# EAGLE board 2D_PCB (EAGLE 9.7.0)
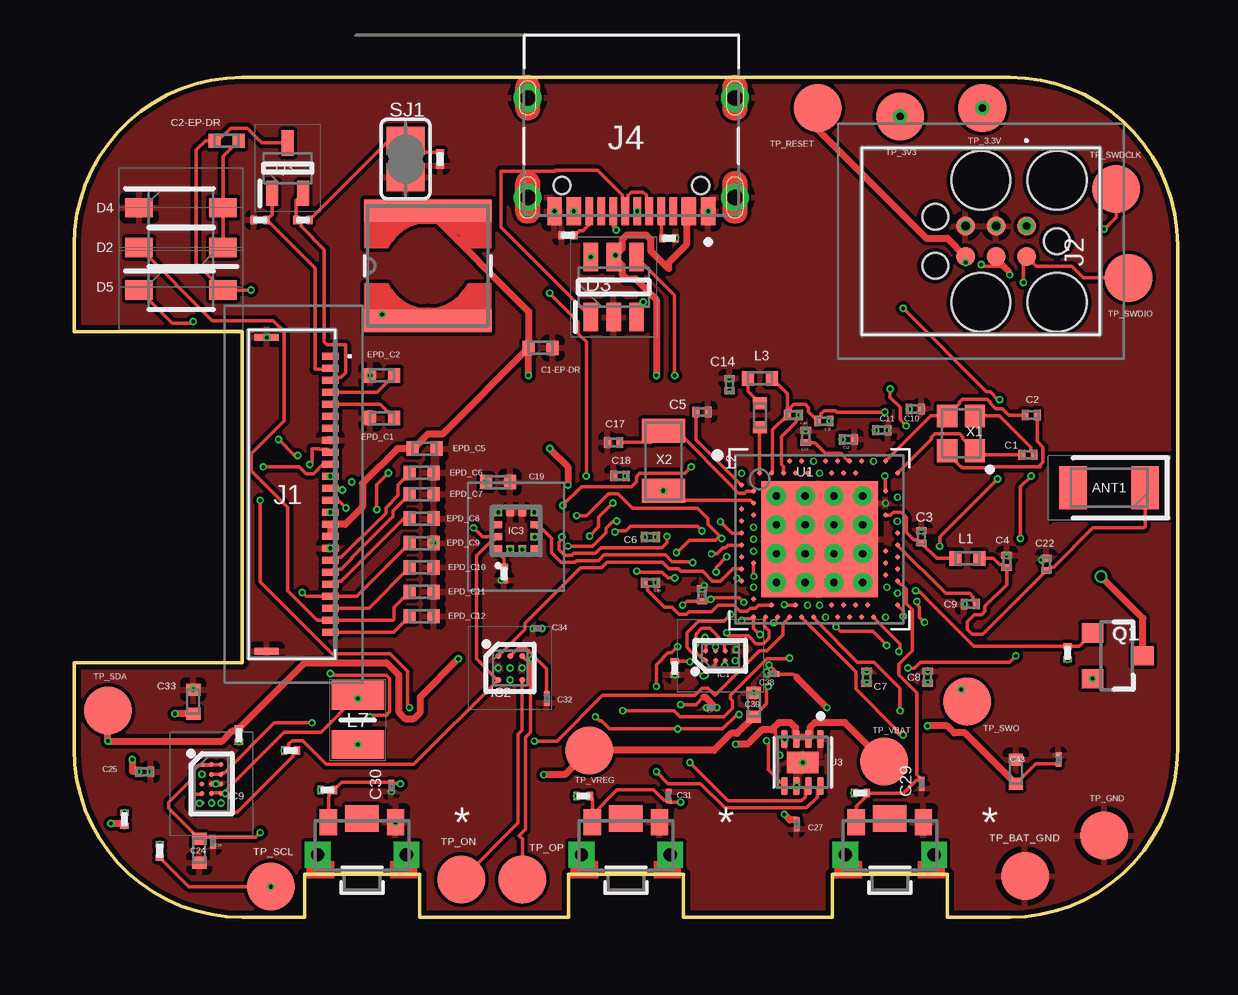
[diagram p0: board, top side]
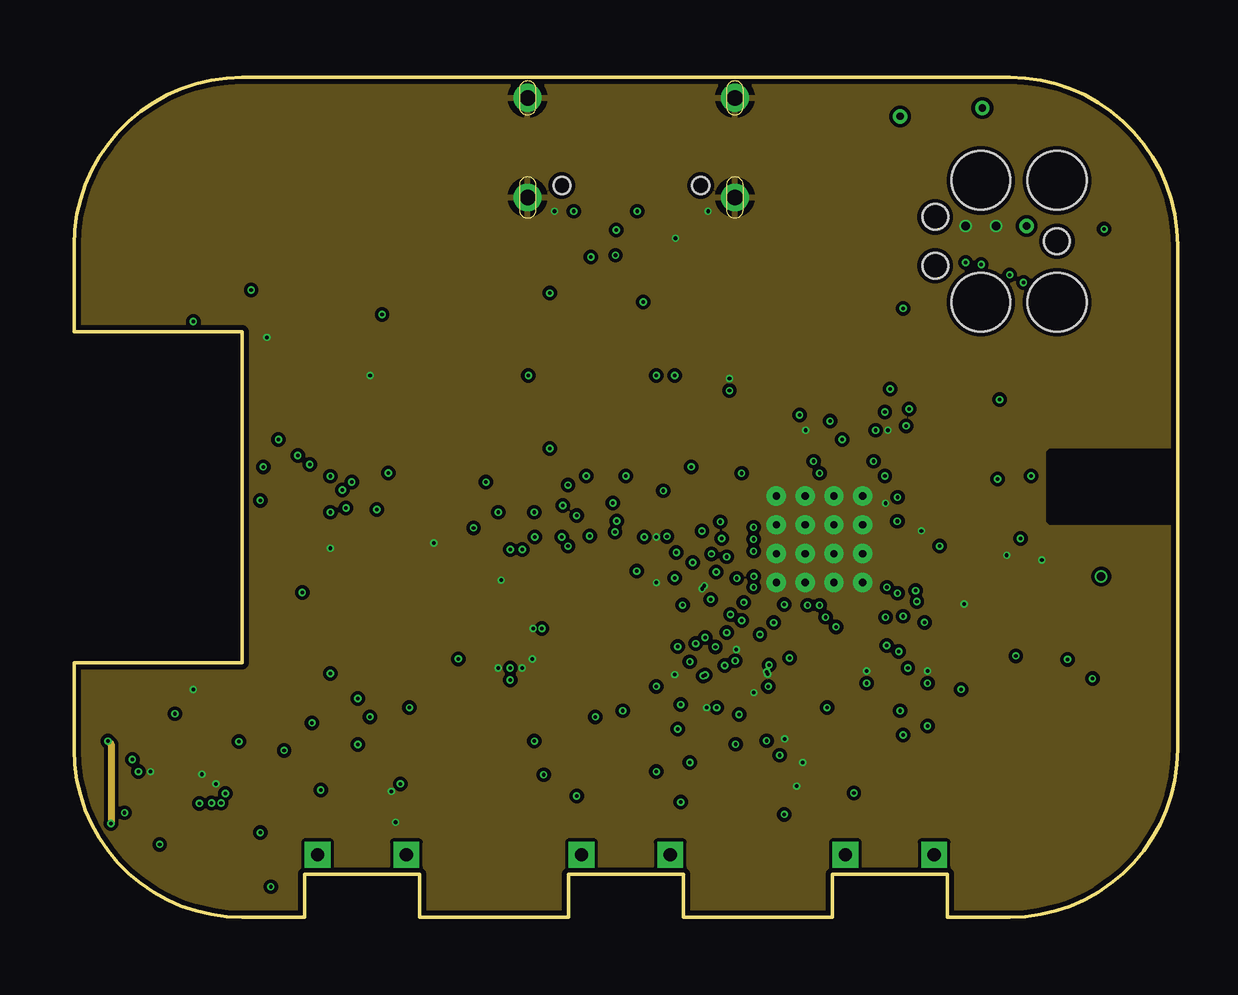
[diagram p1: board, inner layer Route2]
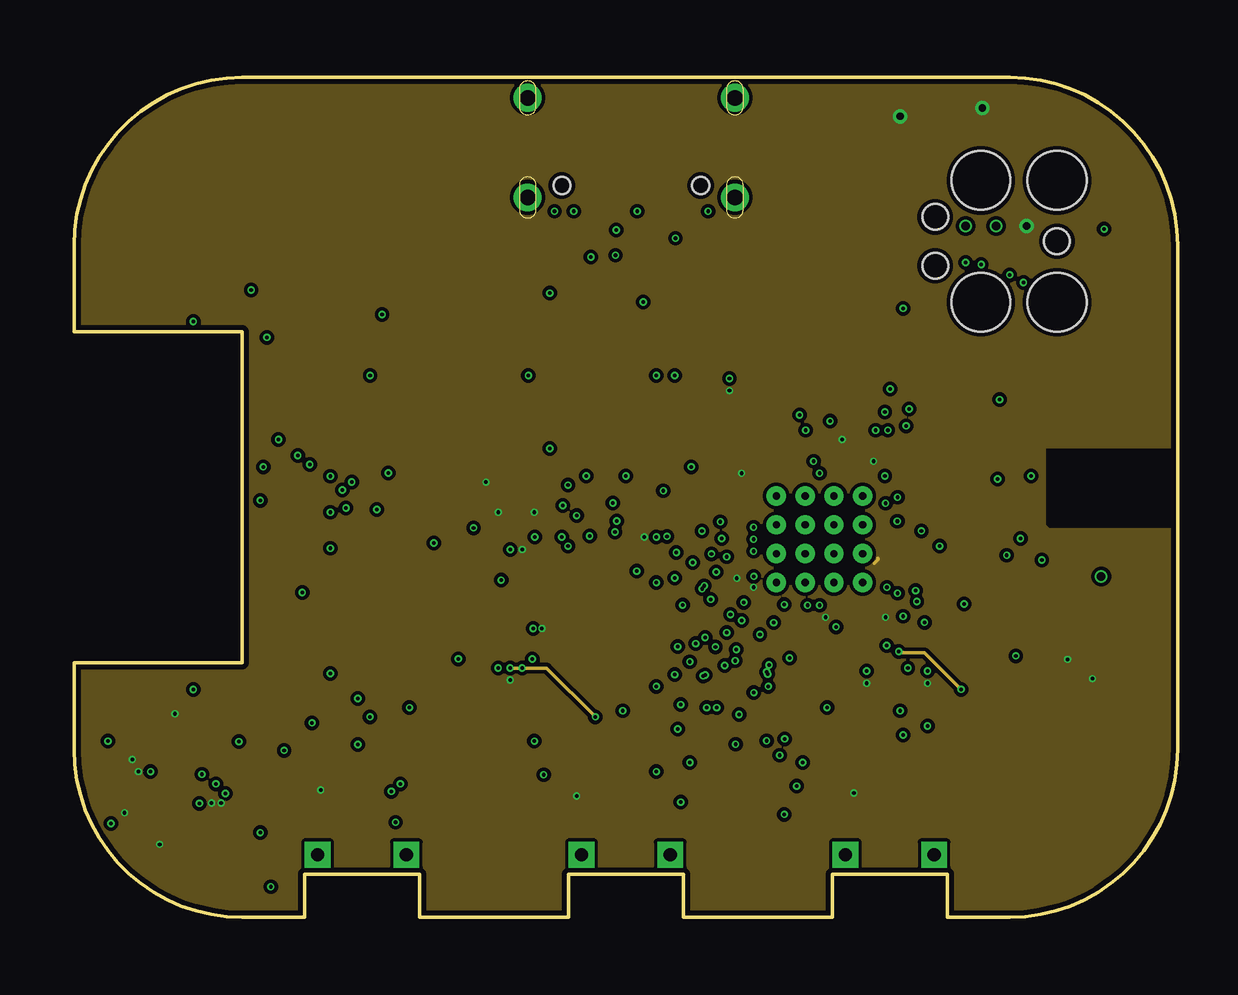
[diagram p2: board, inner layer Route15]
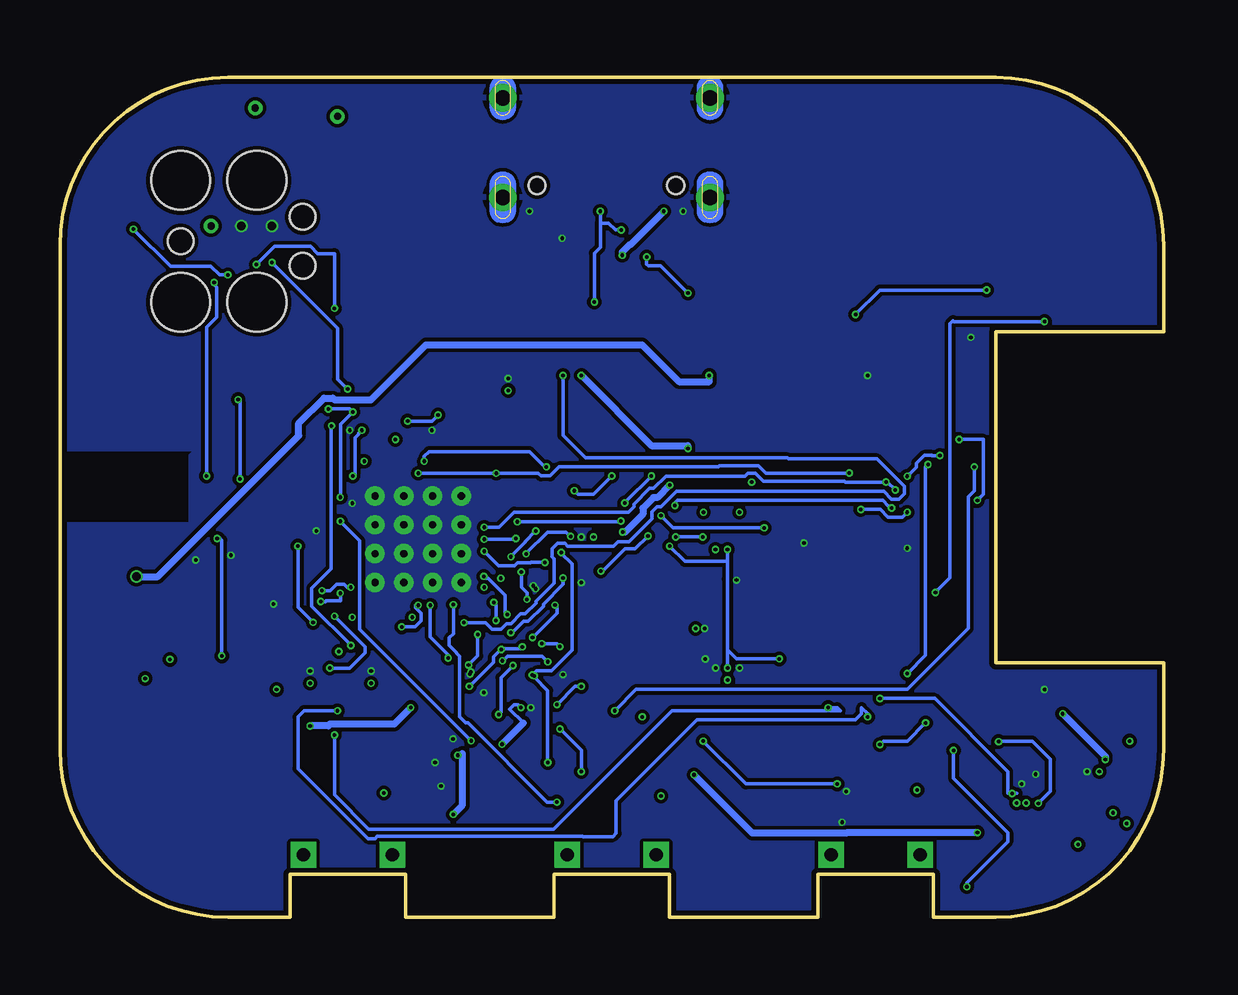
[diagram p3: board, bottom side, seen from below]

Size 46 x 35 mm. Coordinates in mm from the lower left corner, seen from the top.
Outline: 7,35 39,35 arc-90 46,28 46,7 arc-90 39,0 36.4,0 36.4,1.8 31.6,1.8 31.6,0 25.4,0 25.4,1.8 20.6,1.8 20.6,0 14.4,0 14.4,1.8 9.6,1.8 9.6,0 7,0 arc-90 0,7 0,10.6 7,10.6 7,24.4 0,24.4 0,28 arc-90 7,35
Copper layers (1+2*15+16): Top 0.035mm / dielectric 1.5mm / Route2 0.035mm / dielectric 0.15mm / Route15 0.035mm / dielectric 0.2mm / Bottom 0.035mm
Design rules "Fusion Electronics Design Rules *": minimum track width 0.15mm, minimum drill 0.15mm, track to track 0.15mm, track to pad 0.15mm, pad to pad 6mil, via to via 6mil, smd to smd 6mil, copper to edge 0.2mm, drill to drill 6mil, minimum pad ring 10mil, minimum via ring 0.05mm, stop-mask expansion 4mil, vias tented up to drill 9999mil, thermal gap 10mil

## Footprints (pad centres in the part's own frame; a part is rotated, then mirrored left to right if it is on the bottom)
2450AT18B100E_ANTC3216X140N = smd 1.15 x 1.8: 1 -1.5,0; 2 1.5,0
NORDIC_NRF_3_RESC0201_L = smd 0.28 x 0.43: 1 -0.255,0; 2 0.255,0
NORDIC_NRF_3_RESC0402_L = smd 0.5 x 0.6: 1 -0.5,0; 2 0.5,0
GRM011R60J152KE01L_2_CAPC0201X13N = smd 0.22 x 0.23: 1 -0.185,0; 2 0.185,0
ESP32_C6_LIBRARY_5_SOD3716X135N = smd 1.15 x 0.8: 1 -1.75,0; 2 1.75,0
ESP32_C6_LIBRARY_3_SOT95P280X145-6N = smd 1.2 x 0.6: 1 -1.25,0.95; 2 -1.25,0; 3 -1.25,-0.95; 4 1.25,-0.95; 5 1.25,0; 6 1.25,0.95
BQ25180YBGR_BGA8C40P2X4_100X155X50 = smd 0.2 x 0.2: A1 -0.2,0.6; A2 0.2,0.6; B1 -0.2,0.2; B2 0.2,0.2; C1 -0.2,-0.2; C2 0.2,-0.2; D1 -0.2,-0.6; D2 0.2,-0.6
DRV2605YZFR_BGA9C50P3X3_144X144X62 = smd 0.25 x 0.25: A1 -0.5,0.5; A2 0,0.5; A3 0.5,0.5; B1 -0.5,0; B2 0,0; B3 0.5,0; C1 -0.5,-0.5; C2 0,-0.5; C3 0.5,-0.5
BMA423_BMA423 = smd 0.3 x 0.35: 1 -0.75,-0.775; 2 -0.25,-0.775; 3 0.25,-0.775; 4 0.75,-0.775; 7 0.75,0.775; 8 0.25,0.775; 9 -0.25,0.775; 10 -0.75,0.775 | smd 0.35 x 0.3: 5 0.775,-0.25; 6 0.775,0.25; 11 -0.775,0.25; 12 -0.775,-0.25
RT6160AWSC_BGA15C40P3X5_140X230X60 = smd 0.216 x 0.216: A1 -0.4,0.8; A2 0,0.8; A3 0.4,0.8; B1 -0.4,0.4; B2 0,0.4; B3 0.4,0.4; C1 -0.4,0; C2 0,0; C3 0.4,0; D1 -0.4,-0.4; D2 0,-0.4; D3 0.4,-0.4; E1 -0.4,-0.8; E2 0,-0.8; E3 0.4,-0.8
503480-2400_5034802400 = smd 0.3 x 0.7: 1 -5.75,1.525; 2 -5.25,1.525; 3 -4.75,1.525; 4 -4.25,1.525; 5 -3.75,1.525; 6 -3.25,1.525; 7 -2.75,1.525; 8 -2.25,1.525; 9 -1.75,1.525; 10 -1.25,1.525; 11 -0.75,1.525; 12 -0.25,1.525; 13 0.25,1.525; 14 0.75,1.525; 15 1.25,1.525; 16 1.75,1.525; 17 2.25,1.525; 18 2.75,1.525; 19 3.25,1.525; 20 3.75,1.525; 21 4.25,1.525; 22 4.75,1.525; 23 5.25,1.525; 24 5.75,1.525 | smd 0.3 x 1: MP1 -6.54,-1.125; MP2 6.54,-1.125
TC2030-IDC_TC2030IDC = smd 0.783 x 0.783: 1 -0.953,-0.635; 2 -0.953,0.635; 3 0.317,-0.635; 4 0.317,0.635; 5 1.588,-0.635; 6 1.588,0.635 | hole 2.451: -2.223,-2.54; -2.223,2.54; 0.952,-2.54; 0.952,2.54 | hole 1.067: -2.223,0; 2.857,-1.016; 2.857,1.016
KH-TYPE-C-16P_KINGHELM_KH-TYPE-C-16P = smd 0.6 x 1.15: A1_B12 -3.2,4.725; A4_B9 -2.4,4.725; A9_B4 2.4,4.725; A12_B1 3.2,4.725 | smd 0.3 x 1.15: A5 -1.25,4.725; A6 -0.25,4.725; A7 0.25,4.725; A8 1.25,4.725; B5 1.75,4.725; B6 0.75,4.725; B7 -0.75,4.725; B8 -1.75,4.725 | drill 0.65 pad 1.05: SH1 -4.32,0; SH2 4.32,0; SH3 -4.32,4.15; SH4 4.32,4.15 | hole 0.7: -2.89,3.65; 2.89,3.65
NORDIC_NRF_2_RESC0402_L = smd 0.5 x 0.6: 1 -0.5,0; 2 0.5,0
ESP32_C6_LIBRARY_2_IND_4828-WE-TPC_WRE = smd 0.9 x 5.3: 1 -2.286,0; 2 2.286,0
MLP2016SR47MT0S1_INDC2016X100N = smd 1.2 x 2.2: 1 -1.028,0; 2 1.028,0
ESP32_C6_LIBRARY_4_ESP32_C6_LIBRARY_4_ESP32_C6_LIBRARY_4_ESP32_C6_LIBRARY_4_ESP32_WROVER_SPARKFUN-DISCRETESEMI_SOT23-3 = smd 0.8 x 0.9: 1 -0.95,-1; 2 0.95,-1; 3 0,1.1
ESP32_C6_LIBRARY_6_SOT65P210X110-3N = smd 1.05 x 0.5: 1 -1.05,0.65; 2 -1.05,-0.65; 3 1.05,0
ERA-1AEB3401C_0201 = smd 0.35 x 0.25: 1 0,0.275; 2 0,-0.275
ESP32_C6_LIBRARY_7_JUMPER_SJ = smd 1.168 x 1.6: 1 -0.762,0; 2 0.762,0
2025-10-22_07-23-44_LIBRARY_SW_EVP-AKE31A_PAN = smd 0.711 x 1.092: 1 -1.4,-0.972; 2 1.4,-0.972 | drill 0.559 pad 0.914 square: 3 -1.848,0.381; 4 1.848,0.381 | smd 1.397 x 1.092: 5 0,-1.124
HECTOR_WATCH_1_TP20R = smd 2 x 2: TP 0,0
NORDIC_NRF_4_AQFN50P700X700X85_HS-74N = smd 4.85 x 4.85: P$74 0,0 | drill 0.3 pad 0.6: P$75 -1.8,1.8; P$76 -0.6,1.8; P$77 0.6,1.8; P$78 1.8,1.8; P$79 -1.8,0.6; P$80 -0.6,0.6; P$81 0.6,0.6; P$82 1.8,0.6; P$83 -1.8,-0.6; P$84 -0.6,-0.6; P$85 0.6,-0.6; P$86 1.8,-0.6; P$87 -1.8,-1.8; P$88 -0.6,-1.8; P$89 0.6,-1.8; P$90 1.8,-1.8 | smd 0.2 x 0.2: P$A8 -1.25,3.25; P$A10 -0.75,3.25; P$A12 -0.25,3.25; P$A14 0.25,3.25; P$A16 0.75,3.25; P$A18 1.25,3.25; P$A20 1.75,3.25; P$A22 2.25,3.25; P$A23 2.75,3.25; P$AA24 3.25,-2.25; P$AB2 -2.75,-2.5; P$AC5 -2,-2.75; P$AC9 -1,-2.75; P$AC11 -0.5,-2.75; P$AC13 0,-2.75; P$AC15 0.5,-2.75; P$AC17 1,-2.75; P$AC19 1.5,-2.75; P$AC21 2,-2.75; P$AC24 3.25,-2.75; P$AD2 -2.75,-3.25; P$AD4 -2.25,-3.25; P$AD6 -1.75,-3.25; P$AD8 -1.25,-3.25; P$AD10 -0.75,-3.25; P$AD12 -0.25,-3.25; P$AD14 0.25,-3.25; P$AD16 0.75,-3.25; P$AD18 1.25,-3.25; P$AD20 1.75,-3.25; P$AD22 2.25,-3.25; P$AD23 2.75,-3.25; P$B1 -3.25,2.75; P$B3 -2.5,2.75; P$B5 -2,2.75; P$B7 -1.5,2.75; P$B9 -1,2.75; P$B11 -0.5,2.75; P$B13 0,2.75; P$B15 0.5,2.75; P$B17 1,2.75; P$B19 1.5,2.75; P$B24 3.25,2.75; P$C1 -3.25,2.25; P$D2 -2.75,2; P$D23 2.75,2; P$E24 3.25,1.75; P$F2 -2.75,1.5; P$F23 2.75,1.5; P$G1 -3.25,1.25; P$H2 -2.75,1; P$H23 2.75,1; P$J1 -3.25,0.75; P$J24 3.25,0.75; P$K2 -2.75,0.5; P$L1 -3.25,0.25; P$L24 3.25,0.25; P$M2 -2.75,0; P$N1 -3.25,-0.25; P$N24 3.25,-0.25; P$P2 -2.75,-0.5; P$P23 2.75,-0.5; P$R1 -3.25,-0.75; P$R24 3.25,-0.75; P$T2 -2.75,-1; P$T23 2.75,-1; P$U1 -3.25,-1.25; P$U24 3.25,-1.25; P$V23 2.75,-1.5; P$W1 -3.25,-1.75; P$W24 3.25,-1.75; P$Y2 -2.75,-2; P$Y23 2.75,-2
ESP32_C6_LIBRARY_SON50P200X200X80-9N = smd 0.76 x 0.27: 1 -0.985,0.75; 2 -0.985,0.25; 3 -0.985,-0.25; 4 -0.985,-0.75; 5 0.985,-0.75; 6 0.985,-0.25; 7 0.985,0.25; 8 0.985,0.75 | smd 0.9 x 1.3: 9 0,0
NORDIC_NRF_BT-XTAL_2016_N = smd 0.95 x 0.85: 1 -0.725,-0.575; 2 0.725,-0.575; 3 0.725,0.575; 4 -0.725,0.575
NORDIC_NRF_1_XTAL_3215_N = smd 1 x 1.8: 1 -1.25,0; 2 1.25,0

## Placement (x,y rotation side)
ANT1  2450AT18B100E  [2450AT18B100E_ANTC3216X140N]  43.14,17.9 180 top
C1  12pF  [NORDIC_NRF_3_RESC0201_L]  39.76,19.28 0 top
C1-EP-DR  10uF  [NORDIC_NRF_3_RESC0402_L]  19.44,23.72 0 top
C2  12pF  [NORDIC_NRF_3_RESC0201_L]  39.89,20.93 0 top
C2-EP-DR  4.7uF/25V  [NORDIC_NRF_3_RESC0402_L]  6.36,32.36 180 top
C3  1pF  [NORDIC_NRF_3_RESC0201_L]  35.32,15.85 90 top
C4  1pF  [NORDIC_NRF_3_RESC0201_L]  38.88,14.83 90 top
C5  100nF  [NORDIC_NRF_3_RESC0201_L]  26.18,21.06 0 top
C6  4.7µF  [NORDIC_NRF_3_RESC0201_L]  24.02,15.85 0 top
C7  100nF  [NORDIC_NRF_3_RESC0201_L]  33.03,10.01 90 top
C8  100nF  [NORDIC_NRF_3_RESC0201_L]  35.57,10.01 90 top
C9  820pF  [NORDIC_NRF_3_RESC0201_L]  37.35,13.05 180 top
C10  N.C.  [NORDIC_NRF_3_RESC0201_L]  35.06,21.18 0 top
C11  100pF  [NORDIC_NRF_3_RESC0201_L]  33.67,20.29 0 top
C12  100nF  [NORDIC_NRF_3_RESC0201_L]  32.27,19.91 0 top
C13  N.C.  [NORDIC_NRF_3_RESC0201_L]  30.49,20.04 90 top
C14  4.7µF  [NORDIC_NRF_3_RESC0201_L]  27.32,22.2 90 top
C15  1.0µF  [NORDIC_NRF_3_RESC0201_L]  31.26,20.68 0 top
C16  47nF  [NORDIC_NRF_3_RESC0201_L]  29.98,20.93 0 top
C17  12pF  [NORDIC_NRF_3_RESC0201_L]  22.49,19.79 0 top
C18  12pF  [NORDIC_NRF_3_RESC0201_L]  22.75,18.39 0 top
C19  100nF  [NORDIC_NRF_3_RESC0402_L]  17.67,18.14 0 top
C20  4.7µF  [NORDIC_NRF_3_RESC0201_L]  24.02,13.94 0 top
C21  4.7µF  [NORDIC_NRF_3_RESC0201_L]  26.18,13.44 90 top
C22  N.C  [NORDIC_NRF_3_RESC0201_L]  40.53,14.71 90 top
C23  0.1uF  [GRM011R60J152KE01L_2_CAPC0201X13N]  5.79,3.15 90 top
C24  10uF  [NORDIC_NRF_3_RESC0402_L]  5.22,2.77 90 top
C25  22uF  [NORDIC_NRF_3_RESC0201_L]  2.93,6.07 0 top
C27  0.1uF  [GRM011R60J152KE01L_2_CAPC0201X13N]  30.11,3.88 90 top
C29  1uF  [GRM011R60J152KE01L_2_CAPC0201X13N]  35.32,5.56 90 top
C30  1uF  [GRM011R60J152KE01L_2_CAPC0201X13N]  13.22,5.44 90 top
C31  1uF  [GRM011R60J152KE01L_2_CAPC0201X13N]  24.78,5.05 270 top
C32  1uF  [GRM011R60J152KE01L_2_CAPC0201X13N]  19.7,9.12 90 top
C33  22uF  [NORDIC_NRF_3_RESC0402_L]  4.97,8.99 90 top
C34  0.1uF  [GRM011R60J152KE01L_2_CAPC0201X13N]  19.32,12.04 0 top
C37  1uF  [GRM011R60J152KE01L_2_CAPC0201X13N]  26.56,8.74 0 top
C38  1uF  [GRM011R60J152KE01L_2_CAPC0201X13N]  29.1,10.13 0 top
C39  10uF  [NORDIC_NRF_3_RESC0402_L]  28.33,8.86 90 top
C42  0.1uF  [GRM011R60J152KE01L_2_CAPC0201X13N]  41.03,6.58 90 top
C43  4.7uF  [NORDIC_NRF_3_RESC0402_L]  39.26,6.07 90 top
D2  MBR0530  [ESP32_C6_LIBRARY_5_SOD3716X135N]  4.46,27.91 180 top
D3  USBLC6-2SC6Y  [ESP32_C6_LIBRARY_3_SOT95P280X145-6N]  22.49,26.26 90 top
D4  MBR0530  [ESP32_C6_LIBRARY_5_SOD3716X135N]  4.46,29.56 0 top
D5  MBR0530  [ESP32_C6_LIBRARY_5_SOD3716X135N]  4.46,26.14 0 top
EPD_C1  1uF/50V  [NORDIC_NRF_3_RESC0402_L]  12.84,20.8 0 top
EPD_C2  1uF/50V  [NORDIC_NRF_3_RESC0402_L]  12.84,22.58 0 top
EPD_C5  0.1uF/50V  [NORDIC_NRF_3_RESC0402_L]  14.62,19.53 180 top
EPD_C6  1uF/50V  [NORDIC_NRF_3_RESC0402_L]  14.49,18.52 180 top
EPD_C7  1uF/50V  [NORDIC_NRF_3_RESC0402_L]  14.49,17.63 180 top
EPD_C8  1uF/50V  [NORDIC_NRF_3_RESC0402_L]  14.49,16.61 180 top
EPD_C9  1uF/50V  [NORDIC_NRF_3_RESC0402_L]  14.49,15.6 180 top
EPD_C10  1uF/50V  [NORDIC_NRF_3_RESC0402_L]  14.49,14.58 180 top
EPD_C11  1uF/50V  [NORDIC_NRF_3_RESC0402_L]  14.49,13.56 180 top
EPD_C12  1uF/50V  [NORDIC_NRF_3_RESC0402_L]  14.49,12.55 180 top
IC1  BQ25180YBGR  [BQ25180YBGR_BGA8C40P2X4_100X155X50]  26.94,10.9 90 top
IC2  DRV2605YZFR  [DRV2605YZFR_BGA9C50P3X3_144X144X62]  18.17,10.39 0 top
IC3  BMA423  [BMA423_BMA423]  18.43,16.1 0 top
IC9  RT6160AWSC  [RT6160AWSC_BGA15C40P3X5_140X230X60]  5.73,5.56 0 top
J1  503480-2400  [503480-2400_5034802400]  9.16,17.63 270 top
J2  TC2030-IDC  [TC2030-IDC_TC2030IDC]  38.75,28.17 180 top
J4  KH-TYPE-C-16P  [KH-TYPE-C-16P_KINGHELM_KH-TYPE-C-16P]  23.23,34.14 180 top
L1  3.9nH  [NORDIC_NRF_2_RESC0402_L]  37.22,14.96 0 top
L2  10µH  [NORDIC_NRF_2_RESC0402_L]  28.59,20.93 90 top
L3  15nH  [NORDIC_NRF_2_RESC0402_L]  28.59,22.45 0 top
L5  68uH  [ESP32_C6_LIBRARY_2_IND_4828-WE-TPC_WRE]  14.74,27.15 90 top
L7  MLP2016SR47MT0S1  [MLP2016SR47MT0S1_INDC2016X100N]  11.82,8.23 90 top
Q1  20V/4.2A/52mΩ/1.4W  [ESP32_C6_LIBRARY_4_ESP32_C6_LIBRARY_4_ESP32_C6_LIBRARY_4_ESP32_C6_LIBRARY_4_ESP32_WROVER_SPARKFUN-DISCRETESEMI_SOT23-3]  43.45,10.9 270 top
Q3  SI1308EDL-T1-GE3  [ESP32_C6_LIBRARY_6_SOT65P210X110-3N]  8.9,31.22 90 top
R1_EP_DR  0.47  [ERA-1AEB3401C_0201]  9.54,29.06 270 top
R1_USB  5K1  [ERA-1AEB3401C_0201]  24.79,28.3 270 top
R2  0  [ERA-1AEB3401C_0201]  6.87,7.59 0 top
R2_EP_DR  10K  [ERA-1AEB3401C_0201]  7.76,29.06 90 top
R2_USB  5K1  [ERA-1AEB3401C_0201]  20.59,28.42 270 top
R3  0  [ERA-1AEB3401C_0201]  17.92,14.32 0 top
R4  0  [ERA-1AEB3401C_0201]  9.03,6.96 90 top
R5  10k  [ERA-1AEB3401C_0201]  10.55,5.31 270 top
R7  10k  [ERA-1AEB3401C_0201]  32.78,5.18 270 top
R8  10k  [ERA-1AEB3401C_0201]  21.22,5.05 90 top
R9  10k  [ERA-1AEB3401C_0201]  25.03,10.39 180 top
R17  3k3  [ERA-1AEB3401C_0201]  3.57,2.77 0 top
R18  3K3  [ERA-1AEB3401C_0201]  2.1,4.08 0 top
R_PWR_EPD  10k  [ERA-1AEB3401C_0201]  41.41,11.02 0 top
R_TYPE_SEL  2.2  [ERA-1AEB3401C_0201]  15.25,31.6 180 top
SJ1  [ESP32_C6_LIBRARY_7_JUMPER_SJ]  13.82,31.6 90 top
SW_DN  2025-10-22_07-23-44_LIBRARY_EVP-AKE31ASW_EVP-AKE31A_PAN  [2025-10-22_07-23-44_LIBRARY_SW_EVP-AKE31A_PAN]  34,2.99 180 top
SW_ENT  2025-10-22_07-23-44_LIBRARY_EVP-AKE31ASW_EVP-AKE31A_PAN  [2025-10-22_07-23-44_LIBRARY_SW_EVP-AKE31A_PAN]  23,2.99 180 top
SW_UP  2025-10-22_07-23-44_LIBRARY_EVP-AKE31ASW_EVP-AKE31A_PAN  [2025-10-22_07-23-44_LIBRARY_SW_EVP-AKE31A_PAN]  12,2.99 180 top
TP_3.3V  HECTOR_WATCH_1_TPTP20R  [HECTOR_WATCH_1_TP20R]  37.86,33.72 0 top
TP_3V3  HECTOR_WATCH_1_TPTP20R  [HECTOR_WATCH_1_TP20R]  34.43,33.38 0 top
TP_BAT_GND  HECTOR_WATCH_1_TPTP20R  [HECTOR_WATCH_1_TP20R]  39.64,1.72 0 top
TP_GND  HECTOR_WATCH_1_TPTP20R  [HECTOR_WATCH_1_TP20R]  42.94,3.4 0 top
TP_ON  HECTOR_WATCH_1_TPTP20R  [HECTOR_WATCH_1_TP20R]  16.14,1.57 0 top
TP_OP  HECTOR_WATCH_1_TPTP20R  [HECTOR_WATCH_1_TP20R]  18.68,1.57 0 top
TP_RESET  HECTOR_WATCH_1_TPTP20R  [HECTOR_WATCH_1_TP20R]  31,33.72 0 top
TP_SCL  HECTOR_WATCH_1_TPTP20R  [HECTOR_WATCH_1_TP20R]  8.2,1.28 0 top
TP_SDA  HECTOR_WATCH_1_TPTP20R  [HECTOR_WATCH_1_TP20R]  1.41,8.61 0 top
TP_SWDCLK  HECTOR_WATCH_1_TPTP20R  [HECTOR_WATCH_1_TP20R]  43.44,30.34 0 top
TP_SWDIO  HECTOR_WATCH_1_TPTP20R  [HECTOR_WATCH_1_TP20R]  43.95,26.64 0 top
TP_SWO  HECTOR_WATCH_1_TPTP20R  [HECTOR_WATCH_1_TP20R]  37.22,8.99 0 top
TP_VBAT  HECTOR_WATCH_1_TPTP20R  [HECTOR_WATCH_1_TP20R]  33.76,6.49 0 top
TP_VREG  HECTOR_WATCH_1_TPTP20R  [HECTOR_WATCH_1_TP20R]  21.48,6.96 0 top
U1  NRF52840_QF  [NORDIC_NRF_4_AQFN50P700X700X85_HS-74N]  31.07,15.76 0 top
U3  MAX17048G+T10  [ESP32_C6_LIBRARY_SON50P200X200X80-9N]  30.37,6.45 270 top
X1  32MHz  [NORDIC_NRF_BT-XTAL_2016_N]  36.97,20.17 90 top
X2  32.768kHz  [NORDIC_NRF_1_XTAL_3215_N]  24.56,19.02 90 top

## Library data of the parts
ANT1 = InkTime_v5; ARROW_PART_NUMBER: 2450AT18B100E; ARROW_PRICE-STOCK: https://www.arrow.com/en/products/2450at18b100e/johanson-dielectrics?utm_currency=USD&region=nac; DESCRIPTION: Antennas 2.45GHz ANTENNA; HEIGHT: 1.4mm; MANUFACTURER_NAME: JOHANSON TECHNOLOGY; MANUFACTURER_PART_NUMBER: 2450AT18B100E; MOUSER_PART_NUMBER: 609-2450AT18B100E; MOUSER_PRICE-STOCK: https://www.mouser.co.uk/ProductDetail/Johanson-Technology/2450AT18B100E?qs=yCnrNFeXz%252Bh5MFsFIXGZGA%3D%3D
C1 C1-EP-DR C2 C2-EP-DR C3-C22 C24 C25 C33 C39 C43 EPD_C1 EPD_C2 EPD_C5-EPD_C12 L1-L3 R1_EP_DR R1_USB R2_EP_DR R2_USB R5 R7 R8 R_TYPE_SEL SJ1 TP_3.3V TP_3V3 TP_BAT_GND TP_GND TP_ON TP_OP TP_RESET TP_SCL TP_SDA TP_SWDCLK TP_SWDIO TP_SWO TP_VBAT TP_VREG U1 X1 X2 = InkTime_v5
C23 C27 C29-C32 C34 C37 C38 C42 = InkTime_v5; AVAILABILITY: In Stock; CHECK_PRICES: https://www.snapeda.com/parts/GRM011R60J152KE01L/Murata/view-part/?ref=eda; DESCRIPTION: SMD Capacitor X5R(EIA) with Capacitance: 1500pF Tol. 10%. Rated Voltage: 6.3Vdc; MF: Murata; MP: GRM011R60J152KE01L; PACKAGE: 0201 Murata; PRICE: None; SNAPEDA_LINK: https://www.snapeda.com/parts/GRM011R60J152KE01L/Murata/view-part/?ref=snap
D2 D4 D5 = InkTime_v5; AVAILABILITY: In Stock; CHECK_PRICES: https://www.snapeda.com/parts/MBR0530/Onsemi/view-part/?ref=eda; DESCRIPTION: Diode Schottky 30 V 500mA Surface Mount SOD-123; MF: ON Semiconductor; MP: MBR0530; PACKAGE: SOD-123-2 ON Semiconductor; PRICE: None; PURCHASE-URL: https://www.snapeda.com/api/url_track_click_mouser/?unipart_id=179458&manufacturer=ON Semiconductor&part_name=MBR0530&search_term=None; SNAPEDA_LINK: https://www.snapeda.com/parts/MBR0530/Onsemi/view-part/?ref=snap
D3 = InkTime_v5; AVAILABILITY: In Stock; CHECK_PRICES: https://www.snapeda.com/parts/USBLC6-2SC6Y/STMicroelectronics/view-part/?ref=eda; DESCRIPTION: 17V Clamp 5A (8/20µs) Ipp Tvs Diode Surface Mount SOT-23-6; MF: STMicroelectronics; MP: USBLC6-2SC6Y; PACKAGE: SOT-23-6 STMicroelectronics; PRICE: None; SNAPEDA_LINK: https://www.snapeda.com/parts/USBLC6-2SC6Y/STMicroelectronics/view-part/?ref=snap
IC1 = InkTime_v5; ARROW_PART_NUMBER: BQ25180YBGR; ARROW_PRICE-STOCK: https://www.arrow.com/en/products/bq25180ybgr/texas-instruments?utm_currency=USD&region=nac; DESCRIPTION: Charger IC Lithium Ion/Polymer, Lithium Iron Phosphate 8-DSBGA (1.6x1.1); HEIGHT: 0.5mm; MANUFACTURER_NAME: Texas Instruments; MANUFACTURER_PART_NUMBER: BQ25180YBGR; MOUSER_PART_NUMBER: 595-BQ25180YBGR; MOUSER_PRICE-STOCK: https://www.mouser.co.uk/ProductDetail/Texas-Instruments/BQ25180YBGR?qs=doiCPypUmgEWjAK%252BJAX6Tw%3D%3D
IC2 = InkTime_v5; ARROW_PART_NUMBER: DRV2605YZFR; ARROW_PRICE-STOCK: https://www.arrow.com/en/products/drv2605yzfr/texas-instruments?region=nac; DESCRIPTION: Haptic Driver for ERM/LRA with Built-In Library and Smart Loop Architecture; HEIGHT: 0.625mm; MANUFACTURER_NAME: Texas Instruments; MANUFACTURER_PART_NUMBER: DRV2605YZFR
IC3 = InkTime_v5; ARROW_PART_NUMBER: BMA423; ARROW_PRICE-STOCK: https://www.arrow.com/en/products/bma423/bosch; DESCRIPTION: Accelerometers Triaxial low-g 12bit Acceleration Sensor; HEIGHT: 1mm; MANUFACTURER_NAME: BOSCH; MANUFACTURER_PART_NUMBER: BMA423; MOUSER_PART_NUMBER: 262-BMA423; MOUSER_PRICE-STOCK: https://www.mouser.co.uk/ProductDetail/Bosch-Sensortec/BMA423?qs=HXFqYaX1Q2xC%252BSgeGoX3mg%3D%3D
IC9 = InkTime_v5; DESCRIPTION: Buck-Boost Regulator Positive Output Step-Up/Step-Down I2C DC-DC Controller IC 15-WL-CSP (BSC) (1.4x2.3); HEIGHT: 0.6mm; MANUFACTURER_NAME: RICHTEK; MANUFACTURER_PART_NUMBER: RT6160AWSC; MOUSER_PART_NUMBER: 835-RT6160AWSC; MOUSER_PRICE-STOCK: https://www.mouser.co.uk/ProductDetail/Richtek/RT6160AWSC?qs=amGC7iS6iy%2FLd9PSoixZXQ%3D%3D
J1 = InkTime_v5; DESCRIPTION: FFC & FPC Connectors 0.5mm FPC RA SMT Dual Contact 24Ckt; HEIGHT: 1.87mm; MANUFACTURER_NAME: Molex; MANUFACTURER_PART_NUMBER: 503480-2400; MOUSER_PART_NUMBER: 538-503480-2400; MOUSER_PRICE-STOCK: https://www.mouser.co.uk/ProductDetail/Molex/503480-2400?qs=OAhjpuo3Vu7efIoxFh9AOw%3D%3D
J2 = InkTime_v5; DESCRIPTION: CABLE ADAPTER 6 POS; HEIGHT: 19mm; MANUFACTURER_NAME: Tag Connect; MANUFACTURER_PART_NUMBER: TC2030-IDC
J4 = InkTime_v5; AVAILABILITY: Not in stock; CHECK_PRICES: https://www.snapeda.com/parts/KH-TYPE-C-16P/Kinghelm/view-part/?ref=eda; MF: kinghelm; MP: KH-TYPE-C-16P; PACKAGE: None; PRICE: None; SNAPEDA_LINK: https://www.snapeda.com/parts/KH-TYPE-C-16P/Kinghelm/view-part/?ref=snap
L5 = InkTime_v5; COPYRIGHT: Copyright (C) 2024 Ultra Librarian. All rights reserved.; MANUFACTURER_PART_NUMBER: 744043680; MFR_NAME: Wurth Electronics; SHOW_VALUE: 68uH
L7 = InkTime_v5; DESCRIPTION: SMD / SMT Inductors (Coils), L=0.47?H, L x W x T :; HEIGHT: 1mm; JLCPCB: https://jlcpcb.com/partdetail/6763488-FTC252012SR47MBCA/C5832368; MANUFACTURER_NAME: TDK; MANUFACTURER_PART_NUMBER: FTC252012SR47MBCA
Q1 = InkTime_v5; PROD_ID: TRAN-14388
Q3 = InkTime_v5; AVAILABILITY: In Stock; CHECK_PRICES: https://www.snapeda.com/parts/SI1308EDL-T1-GE3/Vishay+Siliconix/view-part/?ref=eda; DESCRIPTION: Si1308EDL-T1-GE3 N-channel MOSFET Transistor, 1.5 A, 30 V, 3-Pin SC-70 | Siliconix / Vishay SI1308EDL-T1-GE3; MF: Vishay Siliconix; MP: SI1308EDL-T1-GE3; PACKAGE: SOT-323 Vishay Semiconductor; PRICE: None; PURCHASE-URL: https://www.snapeda.com/api/url_track_click_mouser/?unipart_id=274603&manufacturer=Vishay Siliconix&part_name=SI1308EDL-T1-GE3&search_term=None; SNAPEDA_LINK: https://www.snapeda.com/parts/SI1308EDL-T1-GE3/Vishay+Siliconix/view-part/?ref=snap
R2-R4 = InkTime_v5; RESISTANCE: 0
R9 = InkTime_v5; RESISTANCE: 10k
R17 R18 = InkTime_v5; RESISTANCE: 3k3
R_PWR_EPD = InkTime_v5; RESISTANCE: 10K
SW_DN SW_ENT SW_UP = InkTime_v5; COPYRIGHT: Copyright (C) 2025 Ultra Librarian. All rights reserved.; DIGI-KEY_PART_NUMBER_1: P123437TR-ND; DIGI-KEY_PART_NUMBER_2: P123437CT-ND; DIGI-KEY_PART_NUMBER_3: P123437DKR-ND; MANUFACTURER_NAME: Panasonic; MANUFACTURER_PART_NUMBER: EVP-AKE31A
U3 = InkTime_v5; AVAILABILITY: In Stock; CHECK_PRICES: https://www.snapeda.com/parts/MAX17048G+T10/Analog+Devices/view-part/?ref=eda; DESCRIPTION: 3µA 1-Cell/2-Cell Fuel Gauge with ModelGauge; MF: Analog Devices; MP: MAX17048G+T10; PACKAGE: TDFN-8 Maxim; PRICE: None; PURCHASE-URL: https://www.snapeda.com/api/url_track_click_mouser/?unipart_id=329239&manufacturer=Analog Devices&part_name=MAX17048G+T10&search_term=None; SNAPEDA_LINK: https://www.snapeda.com/parts/MAX17048G+T10/Analog+Devices/view-part/?ref=snap

## Nets
3V3: C6.1 C7.1 C8.1 C12.1 C14.1 C19.1 C25.1 C33.1 C34.2 IC2.C2 IC3.3 IC3.7 IC3.10 IC9.E2 IC9.E3 J2.1 Q1.2 R5.2 R7.2 R8.1 R17.1 R18.1 R_PWR_EPD.2 TP_3.3V.TP TP_3V3.TP U1.P$A22 U1.P$AD14 U1.P$AD23 U1.P$B1 U1.P$W1 U1.P$Y2
ALERT: U1.P$J24 U3.5
D+: D3.4 U1.P$AD6
D-: D3.6 U1.P$AD4
DEC1: C5.1 U1.P$C1
DN: D3.1 J4.A7 J4.B7
DP: D3.3 J4.A6 J4.B6
EPD_3V3: C1-EP-DR.1 EPD_C5.2 J1.15 J1.16 L5.2 Q1.3
EPD_BUSY: J1.9 U1.P$AD12
EPD_CS: J1.12 U1.P$K2
EPD_DC: J1.11 U1.P$AD10
EPD_RST: J1.10 U1.P$AC11
GDR: J1.2 Q3.1 R2_EP_DR.2
GND: C1-EP-DR.2 C3.2 C4.2 C5.2 C6.2 C7.2 C8.2 C9.2 C10.2 C11.2 C12.2 C13.2 C14.2 C17.1 C18.1 C19.2 C20.2 C21.2 C22.2 C23.1 C24.1 C25.2 C27.1 C29.1 C30.1 C31.1 C32.1 C33.2 C34.1 C37.1 C38.1 C39.2 C42.2 C43.2 D3.2 D4.1 EPD_C1.1 EPD_C2.1 EPD_C5.1 EPD_C6.1 EPD_C7.1 EPD_C8.1 EPD_C9.1 EPD_C10.1 EPD_C11.1 EPD_C12.1 IC1.D2 IC2.B1 IC2.B3 IC3.8 IC3.9 IC9.B1 IC9.C2 IC9.C3 J1.8 J1.17 J1.MP1 J1.MP2 J2.3 J2.5 J4.A1_B12 J4.A12_B1 J4.SH1 J4.SH2 J4.SH3 J4.SH4 R1_USB.1 R2_EP_DR.1 R2_USB.2 R3.2 R9.1 R_TYPE_SEL.1 SJ1.1 SW_DN.1 SW_ENT.1 SW_UP.1 TP_BAT_GND.TP TP_GND.TP U1.P$74 U1.P$75 U1.P$76 U1.P$77 U1.P$78 U1.P$79 U1.P$80 U1.P$81 U1.P$82 U1.P$83 U1.P$84 U1.P$85 U1.P$86 U1.P$87 U1.P$88 U1.P$89 U1.P$90 U1.P$F23 U3.1 U3.4 U3.6 U3.9
HAPTIC_EN: IC2.A1 U1.P$U1
IMU_INT1: IC3.5 U1.P$N1
IMU_INT2: IC3.6 U1.P$P2
LX1: IC9.B2 IC9.B3 L7.1
LX2: IC9.D2 IC9.D3 L7.2
MOSI: J1.14 U1.P$B13
N$2: C20.1 U1.P$AC5
N$3: IC1.D1 R9.2
N$4: C9.1 U1.P$N24
N$5: C3.1 L1.1 U1.P$H23
N$6: IC9.D1 R4.2
N$7: ANT1.1 C4.1 C22.1 L1.2
N$8: IC9.E1 R2.2
N$9: C10.1 C15.1 C16.1 L3.2 U1.P$B5 U1.P$E24
N$10: IC3.1 R3.1
N$11: C11.1 U1.P$D23
N$12: C2.1 U1.P$A23 X1.3
N$13: C2.2 X1.4
N$14: C1.2 X1.2
N$15: C1.1 U1.P$B24 X1.1
N$16: L2.2 L3.1
N$17: C2-EP-DR.2 D5.2 L5.1 Q3.3
N$18: C2-EP-DR.1 D2.1 D4.2
N$19: C13.1 U1.P$A18
N$20: R1_EP_DR.1 R_TYPE_SEL.2 SJ1.2
N$21: J4.A5 R1_USB.2
N$22: EPD_C8.2 J1.20
N$23: EPD_C2.2 J1.4
N$24: EPD_C1.2 J1.5
N$25: EPD_C6.2 J1.18
N$26: EPD_C7.2 J1.19
N$28: C32.2 IC2.A2
N$29: EPD_C10.2 J1.22
N$30: C15.2 C16.2 U1.P$B7
N$32: L2.1 U1.P$B3
N$33: EPD_C12.2 J1.24
N$38: J4.B5 R2_USB.1
OUT+: IC2.A3 TP_OP.TP
OUT-: IC2.C3 TP_ON.TP
P0.00/XL1: C17.2 U1.P$D2 X2.2
P0.00/XL2: C18.2 U1.P$F2 X2.1
P0.04: U1.P$J1
P0.09: U1.P$L24
P0.13: C30.2 R5.1 SW_UP.2 U1.P$AD8
P0.14: C31.2 R8.2 SW_ENT.2 U1.P$AC9
P0.19: U1.P$AC15
P0.20: U1.P$AD16
P0.21: U1.P$AC17
P0.22: U1.P$AD18
P0.23: U1.P$AC19
P0.24: U1.P$AD20
P0.25: U1.P$AC21
P0.26: U1.P$G1
P0.27: U1.P$H2
P0.28: U1.P$B11
P0.29: U1.P$A10
P0.30: U1.P$B9
P0.31: U1.P$A8
P1.01: Q1.1 R_PWR_EPD.1 U1.P$Y23
P1.02: C29.2 R7.1 SW_DN.2 U1.P$W24
P1.03: U1.P$V23
P1.04: U1.P$U24
P1.05: U1.P$T23
P1.06: U1.P$R24
P1.07: U1.P$P23
P1.09: U1.P$R1
P1.10: U1.P$A20
P1.11: U1.P$B19
P1.12: U1.P$B17
P1.13: U1.P$A16
P1.14: U1.P$B15
P1.15: U1.P$A14
PMIC_INT: IC1.A1 U1.P$T2
PREVGH: D5.1 EPD_C9.2 J1.21
PREVGL: D2.2 EPD_C11.2 J1.23
RESE: J1.3 Q3.2 R1_EP_DR.2
RESET: J2.6 TP_RESET.TP U1.P$AC13
SCK: J1.13 U1.P$A12
SCL: IC1.B1 IC2.C1 IC3.12 R4.1 R17.2 TP_SCL.TP U1.P$M2 U3.7
SDA: IC1.C1 IC2.B2 IC3.2 R2.1 R18.2 TP_SDA.TP U1.P$L1 U3.8
SWDCLK: J2.4 TP_SWDCLK.TP U1.P$AA24
SWDIO: J2.2 TP_SWDIO.TP U1.P$AC24
SWO: TP_SWO.TP U1.P$AD22
VBAT: C27.2 C37.2 IC1.C2 TP_VBAT.TP U3.2 U3.3
VBUS: C21.1 C38.2 C42.1 C43.1 D3.5 IC1.A2 J4.A4_B9 J4.A9_B4 U1.P$AD2
VREG: C23.2 C24.2 C39.1 IC1.B2 IC9.A1 IC9.A2 IC9.A3 TP_VREG.TP

## Tracks (layer width: path | path; a pad name or v marks a point on that pad's centre or on a via)
3V3  (via drill 0.15 pad 0.3, 0.3 pad 0.6)
  Top 0.15: v27.63,14.13 27.7,14.13 U1.P$W1
  Top 0.3: C33.1 4.21,8.49 v4.2,8.48 | v2.43,6.58 2.43,6.08 C25.1
  Route15 0.152: 33.37,14.75 33.5,14.89 33.5,14.96
  Bottom 0.3: v4.2,8.48 2.43,6.71 v2.43,6.58
  other vias: 34.43,33.38 37.86,33.72 39.7,28.8 42.45,9.95 41.41,10.75 17.17,18.14 17.68,16.88 19.18,16.88 18.68,15.33 23.76,15.85 20.95,5.05 32.5,5.18 33.03,9.75 18.68,15.33 19.5,12.04 18.17,9.89 6.13,4.76 5.73,4.76 10.28,5.31 27.32,21.94 27.82,18.51 33.32,19.01 32.02,19.91 33.82,12.51 2.68,6.07 2.1,4.36 3.57,3.04 35.57,9.75 28.32,13.76 31.32,12.51
  pour Route15: 6.17,11.49 6.15,11.47 6.12,11.45 6.09,11.45 6.07,11.47 5.82,11.71 -0.97,11.71 -1.05,11.63 -1.05,4.2 4.49,-1.35 41.08,-1.35 41.08,-1.03 41.1,-1 46.55,4.45 46.55,16.17 46.54,16.17 46.51,16.15 40.64,16.15 40.61,16.17 40.46,16.31 40.45,16.34 40.45,19.55 40.46,19.58 40.48,19.6 40.51,19.61 46.97,19.61 47.05,19.69 47.05,30.17 42.02,35.2 3.98,35.2 -1.05,30.17 -1.05,24.9 0.17,23.67 6.25,23.67 6.28,23.66 6.3,23.64 6.31,23.61 6.31,23.58 6.3,23.55 6.19,23.44 6.19,11.52
ALERT  (via drill 0.15 pad 0.3)
  Top 0.15: U3.5 28.94,6.15 28.94,7.28 v28.86,7.36
  Route15 0.3: v34.31,16.51 U1.P$J24
  Bottom 0.15: v34.31,16.51 34.31,16.49 33.5,15.69 33.5,12 v28.86,7.36
  other vias: 34.32,16.51
D+  (via drill 0.15 pad 0.3)
  Top 0.15: D3.4 25.03,25.92 v25.03,22.58 | U1.P$AD6 29.32,12.47 29.16,12.31 v29.16,12.28
  Bottom 0.15: v25.03,22.58 25.03,20.09 24.09,19.15 15.68,19.15 15.63,19.1 11.94,19.1 10.8,17.96 10.8,17.65 11.02,17.43 11.34,17.43 11.66,17.76 20.3,17.76 20.95,17.11 21.11,17.11 21.33,16.89 21.33,16.6 22.27,15.65 22.74,15.65 22.92,15.47 24.84,15.47 24.95,15.58 25.26,15.58 25.48,15.36 25.48,15.02 25.41,14.95 25.41,14.3 25.41,13.92 26.16,13.18 26.16,13.09 26.61,12.64 26.8,12.64 27.2,12.24 27.38,12.24 27.62,11.99 27.98,11.99 28.27,12.28 v29.16,12.28
D-  (via drill 0.15 pad 0.3)
  Top 0.15: v19.82,26.01 21.02,24.82 21.02,24.32 21.35,23.98 v21.35,18.39 | v25.03,14.14 24.75,14.14 24.5,14.39 23.45,14.39 v23.45,14.42 | v21.49,15.89 21.87,16.27 21.87,16.68 v22.46,17.27 | v27.21,11.86 27.21,11.79 27.25,11.74 28.1,11.74 28.43,11.41 28.74,11.41 28.96,11.63 28.96,11.94 28.79,12.12 28.79,12.47 U1.P$AD4
  Bottom 0.15: v19.82,26.01 20.97,27.15 21.48,27.15 21.54,27.22 D3.6 | v21.35,18.39 22.4,17.33 22.4,17.32 v22.46,17.27 | v21.49,15.89 22.03,15.35 22.45,15.35 23.38,14.42 v23.45,14.42 | v27.21,11.86 27.19,11.88 27.14,11.88 26.68,12.34 26.48,12.34 25.85,12.97 25.85,13.05 25.03,13.87 v25.03,14.14
  other vias: 21.54,27.51
DEC1
  Top 0.15: U1.P$C1 25.92,19.91 C5.1
DN
  Top 0.15: J4.B7 23.85,29.54 23.85,30.09 23.72,30.22 23.23,30.22 23.1,30.09 23.1,29.54 J4.A7 22.85,29.54 22.85,30.09 21.82,31.12 20.08,31.12 20.05,31.09 17.79,31.09 17.79,28.76 D3.1
DP  (via drill 0.15 pad 0.3)
  Top 0.15: D3.3 23.44,25.36 v23.72,25.64 | v22.6,28.64 22.48,28.77 J4.B6
  Bottom 0.15: 23.48,28.93 23.48,27.92 23.72,27.67 v23.72,25.64 | J4.A6 23.48,28.93 | 23.48,28.93 23.13,28.93 22.84,28.64 v22.6,28.64
  other vias: 23.48,29.42
EPD_3V3  (via drill 0.15 pad 0.3, 0.35)
  Top 0.3: Q1.3 44.55,12.46 v42.81,14.2 | L5.2 18.94,25.24 C1-EP-DR.1 | C1-EP-DR.1 15.36,20.13 14.74,20.13 14.14,19.53 EPD_C5.2 13.47,19.53 12.02,18.08 12.02,17.1 11.3,16.38 J1.15 J1.16 | v18.94,22.58 C1-EP-DR.1
  Bottom 0.3: v18.94,22.58 18.94,22.33 20.21,22.33 21.73,23.85 30.74,23.85 33.03,21.56 34.55,21.56 34.62,21.63 35,21.63 36.05,20.59 36.05,20.07 41.92,14.2 v42.81,14.2
EPD_BUSY  (via drill 0.15 pad 0.3)
  Top 0.15: v34.43,8.61 34.43,9.54 33.33,10.64 32.65,10.64 30.94,12.35 30.94,12.38 U1.P$AD12 | v12.33,8.36 12.41,8.43 13.02,8.43 13.15,8.56 13.15,9.95 13.02,10.08 10.73,10.08 10.68,10.13 v10.68,10.16 | v9.82,18.87 9.92,18.97 9.92,19.53 10.21,19.53 10.24,19.5 10.56,19.5 J1.9
  Bottom 0.15: v34.43,8.61 35.83,8.61 36.08,8.36 36.08,6.2 33.16,3.28 32.87,3.28 32.78,3.37 24.21,3.37 24.2,3.37 22.95,3.37 22.82,3.5 22.82,4.86 19.44,8.23 12.84,8.23 12.59,8.48 12.59,8.74 12.33,8.48 v12.33,8.36 | v10.68,10.16 9.92,10.92 9.92,18.77 v9.82,18.87
EPD_CS  (via drill 0.15 pad 0.3)
  Top 0.15: J1.12 11.11,17.88 v11.18,17.81
  Bottom 0.15: U1.P$K2 27.7,16.26 27.07,16.89 22.3,16.89 22.08,17.11 22.08,17.21 21.42,17.87 21.26,17.87 20.74,18.39 17.45,18.39 17.32,18.51 17.01,18.51 16.68,18.18 13.3,18.18 13.25,18.14 v11.57,18.14 11.51,18.14 v11.18,17.81
  other vias: 28.32,16.26
EPD_DC  (via drill 0.15 pad 0.3)
  Top 0.15: U1.P$AD10 32.59,10.24 32.59,9.52 34.3,7.8 34.3,7.72 34.43,7.59 v34.56,7.59 | v7.76,17.37 7.76,13.98 10.75,10.99 13.18,10.99 13.91,10.26 13.91,8.81 v13.98,8.74 | v8.52,19.91 9.2,19.24 v9.32,19.24
  Bottom 0.15: v7.76,17.37 7.51,17.63 7.51,19.91 v8.52,19.91 | v34.56,7.59 34.56,5.1 33.13,3.67 25.42,3.67 20.48,8.61 13.47,8.61 13.6,8.74 v13.98,8.74 | J1.11 10.3,18.76 10.3,18.93 9.98,19.25 9.66,19.25 9.66,19.24 v9.32,19.24
  other vias: 10.68,18.38
EPD_RST  (via drill 0.15 pad 0.3)
  Top 0.15: v29.82,10.81 29.68,10.81 29.65,10.77 28.87,10.77 27.35,9.26 27.35,9.11 27.44,9.02 27.44,8.71 27.09,8.36 25.26,8.36 25.01,8.61 v22.87,8.61 | v7.88,18.77 v7.89,18.77 9.38,18.77 9.66,18.49 9.98,18.49 10.36,18.88 J1.10
  Bottom 0.15: v22.87,8.61 21.98,9.5 10.68,9.5 8.14,12.04 8.14,17.53 7.88,17.78 v7.88,18.77 | v29.82,10.81 29.82,10.94 30.57,11.69 U1.P$AC11
  other vias: 30.57,13.01
GDR
  Top 0.15: Q3.1 8.25,29.27 R2_EP_DR.2 10.05,27.05 10.05,22.83 10.64,22.83 J1.2
GND  (via drill 0.15 pad 0.3, 0.35)
  Top 0.15: IC9.C3 v5.91,5.56 IC9.C2 | U1.P$84 U1.P$74
  other vias: 5.33,5.96 12.34,22.58 37.16,28.8 38.43,28.8 25.03,10.11 20.03,29.42 35.57,10.26 37.1,13.05 38.88,15.09 26.43,29.42 25.07,28.3 29.62,7.44 14.99,15.6 10.68,15.38 30.12,5.47 30.37,6.45 17.67,10.39 19.1,10.77 24.27,13.94 17.8,14.05 40.34,14.89 28.87,10.23 26.27,13.82 27.32,22.45 30.49,20.3 33.82,17.26 35.32,16.1 28.33,9.36 28.91,10.13 18.67,10.39 3.19,6.07 4.97,9.49 13.4,3.96 13.22,5.25 33.92,20.29 33.03,10.26 24.27,15.85 27.6,11.16 26.18,13.69 19.13,12.04 8.03,24.17 26.37,8.74
  pour Top: 6.3,11.61 6.28,11.59 6.25,11.58 6.22,11.58 6.19,11.59 5.95,11.84 -0.34,11.84 -0.93,11.25 -0.93,4.07 4.24,-1.09 41.13,-1.09 45.78,3.56 45.78,4.05 45.8,4.08 46.67,4.96 46.67,16.41 40.81,16.41 40.7,16.29 40.67,16.28 40.64,16.28 40.61,16.29 40.59,16.31 40.58,16.34 40.58,19.42 40.59,19.45 40.61,19.47 40.64,19.48 45.75,19.48 45.78,19.47 46.37,18.88 47.05,19.56 47.05,30.17 42.02,35.2 3.98,35.2 -1.05,30.17 -1.05,24.05 4.85,24.05 4.88,24.04 6.3,22.62 6.31,22.6 6.31,11.64
  pour Route2: -0.93,3.56 3.85,-1.22 40.8,-1.22 40.82,-1.23 41.08,-1.49 41.08,-0.9 41.1,-0.87 46.67,4.7 46.67,16.43 46.54,16.29 46.51,16.28 40.64,16.28 40.61,16.29 40.46,16.44 40.45,16.47 40.45,19.42 40.46,19.45 40.61,19.6 40.64,19.61 46.8,19.61 46.8,30.04 41.38,35.46 4.15,35.46 4.15,35.39 4.14,35.36 -1.09,30.14 -1.11,30.12 -1.15,30.12 -1.17,30.14 -1.18,30.14 -1.18,24.14 -0.72,23.67 5.87,23.67 5.9,23.66 5.92,23.64 5.93,23.61 5.93,11.9 5.92,11.87 5.9,11.85 5.87,11.84 -0.93,11.84
  pour Bottom: 6.17,11.87 5.77,11.47 5.74,11.45 -0.72,11.45 -1.05,11.12 -1.05,3.56 3.98,-1.47 40.7,-1.47 40.7,-1.41 40.72,-1.38 46.67,4.58 46.67,16.41 40.64,16.41 40.61,16.42 40.59,16.44 40.58,16.47 40.58,19.25 40.46,19.36 40.45,19.39 40.45,19.42 40.46,19.45 40.48,19.47 40.51,19.48 46.97,19.48 47.05,19.56 47.05,30.17 42.02,35.2 3.98,35.2 -1.05,30.17 -1.05,23.88 -0.72,23.55 6,23.55 6.03,23.53 6.17,23.39 6.19,23.36 6.19,11.9
HAPTIC_EN
  Top 0.15: IC2.A1 18.8,12.01 18.8,12.25 21.11,14.56 21.98,14.56 22.22,14.8 24.52,14.8 24.8,14.52 25.19,14.52 25.3,14.41 26.21,14.41 26.61,14.01 26.95,14.01 27.46,14.52 27.77,14.52 27.79,14.51 U1.P$U1
IMU_INT1  (via drill 0.15 pad 0.3)
  Top 0.15: U1.P$N1 27.26,15.51 27.16,15.4 27.05,15.4 26.79,15.14 v26.57,15.14 | v24.71,15.88 24.71,15.62 24.5,15.41 21.97,15.41 21.73,15.17 20.82,15.17 20.75,15.09 20.43,15.09 20.21,15.31 20.21,15.62 20.33,15.75 v20.33,15.85 | IC3.5
  Bottom 0.15: v26.57,15.14 26.57,15.17 25.69,16.05 24.91,16.05 24.74,15.88 v24.71,15.88 | IC3.5 v20.33,15.85
  other vias: 19.2,15.85
IMU_INT2  (via drill 0.15 pad 0.3)
  Top 0.15: IC3.6 19.33,16.23 19.47,16.23 19.91,15.79 19.91,15.19 20.31,14.79 20.87,14.79 20.95,14.86 21.85,14.86 22.09,15.1 24.64,15.1 24.93,14.82 25.75,14.82 v25.78,14.79
  Bottom 0.15: v25.78,14.79 26.37,14.79 26.39,14.77 26.92,14.77 27.05,14.65 27.71,14.65 U1.P$P2
  other vias: 28.32,15.26
LX1  (via drill 0.15 pad 0.3)
  Top 0.15: IC9.B2 IC9.B3 6.19,6.03 6.27,6.03 8.34,8.1 v9.92,8.1
  Bottom 0.15: v9.92,8.1 10.68,7.34 11.69,7.34 L7.1
  other vias: 11.82,7.2
LX2  (via drill 0.15 pad 0.3)
  Top 0.15: v6.31,5.16 IC9.D3 | v11.82,9.12 L7.2 10.29,7.72 8.76,7.72 6.23,5.19 5.75,5.19 IC9.D2
  Bottom 0.15: v6.31,5.16 IC9.D3 6.11,5.18 6.49,5.18 6.49,6.07 9.54,9.12 v11.82,9.12
MOSI  (via drill 0.15 pad 0.3)
  Top 0.15: v13.1,18.51 12.62,18.03 v12.62,17
  Bottom 0.15: U1.P$B13 26.06,18.51 25.95,18.39 25.57,18.39 25.19,18.77 18.56,18.77 18.51,18.82 16.88,18.82 16.58,18.51 v13.1,18.51 | v12.62,17 11.81,17 11.49,16.68 10.88,16.68 J1.14
  other vias: 31.07,18.51 10.68,16.88
N$2
  Top 0.15: U1.P$AC5 28.53,13.01 28.4,12.87 28.2,12.87 28.07,12.75 27.76,12.75 27.5,13.01 26.83,13.01 26.56,12.74 25.63,12.74 25.52,12.63 25.21,12.63 24.91,12.92 24.61,12.92 23.9,13.63 23.9,13.8 C20.1
N$3  (via drill 0.15 pad 0.3)
  Top 0.15: v27.56,10.69 IC1.D1 | R9.2 25.65,10.66 v25.67,10.65
  Bottom 0.15: v27.56,10.69 IC1.D1 27.35,10.88 25.9,10.88 v25.67,10.65
N$4
  Top 0.15: U1.P$N24 36.33,13.5 37.33,13.5 37.46,13.36 37.46,13.2 C9.1
N$5
  Top 0.15: L1.1 35.95,14.96 C3.1 35.18,15.74 35.01,15.74 34.7,16.05 34.7,16.66 34.48,16.88 34.15,16.88 34.02,16.76 U1.P$H23
N$6
  Top 0.15: R4.2 9.11,6.76 9.11,6.69 6.79,4.37 5.06,4.37 4.84,4.6 4.84,4.91 5.06,5.13 5.3,5.13 IC9.D1
N$7
  Top 0.15: L1.2 38.33,14.96 38.57,14.72 38.73,14.72 C4.1 38.88,13.86 37.97,12.96 37.97,12.75 37.84,12.61 37.52,12.61 37.23,12.32 37.23,12.01 37.45,11.79 37.87,11.79 38.58,12.5 C22.1 40.67,14.59 40.84,14.59 42.47,16.23 44.59,16.23 44.64,16.28 ANT1.1
N$8  (via drill 0.15 pad 0.3)
  Top 0.15: v5.22,4.75 5.23,4.76 IC9.E1
  Bottom 0.15: v5.22,4.75 4.71,5.26 4.71,6.58 5.47,7.34 6.85,7.34 R2.2
  other vias: 6.87,7.32
N$9  (via drill 0.15 pad 0.3)
  Top 0.15: v33.8,21.06 31.81,21.06 31.74,21.12 31.28,21.12 31.13,20.97 31.13,20.81 C15.1 30.62,21.06 30.62,21.23 30.47,21.37 30.01,21.37 29.86,21.23 29.86,21.06 C16.1 | U1.P$B5 29.12,18.55 29.12,20.31 C16.1 | C16.1 29.73,21.81 L3.2
  Bottom 0.15: C10.1 33.92,21.18 v33.8,21.06 34.3,20.55 34.3,17.52 U1.P$E24
  other vias: 34.81,21.18 34.32,17.51
N$10
  Top 0.15: IC3.1 17.8,15.21 17.8,15.06 17.92,14.94 R3.1
N$11  (via drill 0.15 pad 0.3)
  Top 0.15: U1.P$D23 33.82,18.36 v33.8,18.39
  Bottom 0.15: v33.8,18.39 33.7,18.49 33.7,19.98 33.55,20.14 33.55,20.16 C11.1
  other vias: 33.41,20.29
N$12
  Top 0.15: U1.P$A23 35.71,20.89 X1.3 36.89,21.39 36.89,21.46 37.03,21.59 38.06,21.59 38.2,21.46 38.2,21.41 38.42,21.19 38.7,21.19 38.96,20.93 C2.1
N$13
  Top 0.15: C2.2 40.15,19.83 40.39,19.59 40.39,18.97 40.27,18.85 40.27,18.77 38.09,18.77 38.06,18.74 37.03,18.74 36.99,18.77 36.97,18.77 36.39,19.34 X1.4
N$14
  Top 0.15: C1.2 39.88,19.42 39.88,19.59 38.57,20.89 X1.2
N$15
  Top 0.15: C1.1 37.71,19.28 X1.1 37.05,19.94 37.05,20.01 36.91,20.14 35.88,20.14 35.74,20.01 35.74,19.93 U1.P$B24
N$16
  Top 0.15: L3.1 28.09,21.93 L2.2
N$17  (via drill 0.15 pad 0.3)
  Top 0.15: Q3.3 7.83,32.27 7.21,32.89 6.52,32.89 5.99,32.36 C2-EP-DR.2 5.47,32.36 5.09,31.98 5.09,27.25 D5.2 v7.38,26.14 | v12.84,25.12 14.49,25.12 L5.1
  Bottom 0.15: v7.38,26.14 11.82,26.14 v12.84,25.12
N$18
  Top 0.15: D2.1 D4.2 6.21,31.7 C2-EP-DR.1
N$19
  Top 0.15: U1.P$A18 32.28,19.01 31.96,19.33 31.33,19.33 30.88,19.79 C13.1
N$20
  Top 0.15: R1_EP_DR.1 13.12,32.36 SJ1.2 14.3,31.87 R_TYPE_SEL.2
N$21
  Top 0.15: R1_USB.2 24.48,28.34 J4.A5
N$22
  Top 0.15: J1.20 10.8,14 11.13,14 13.74,16.61 EPD_C8.2
N$23
  Top 0.15: EPD_C2.2 12.64,21.88 J1.4
N$24
  Top 0.15: EPD_C1.2 12.77,21.38 J1.5
N$25
  Top 0.15: J1.18 10.8,15 11.13,15 12.74,16.62 12.77,16.62 12.99,16.84 12.99,17.06 13.51,17.58 13.51,18.02 13.99,18.5 EPD_C6.2
N$26
  Top 0.15: J1.19 10.8,14.5 11.13,14.5 11.56,14.94 11.56,14.98 13.3,16.71 13.3,16.93 EPD_C7.2
N$28
  Top 0.15: IC2.A2 18.53,11.24 18.82,11.24 19.7,10.36 C32.2
N$29
  Top 0.15: J1.22 12.29,12.88 EPD_C10.2
N$30  (via drill 0.15 pad 0.3)
  Top 0.15: U1.P$B7 29.57,18.79 29.49,18.87 29.49,20.02 30.1,20.62 30.1,20.79 C16.2
  Bottom 0.15: C15.2 30.49,20.68 C16.2
  other vias: 31.51,20.68 30.24,20.93
N$32
  Top 0.15: U1.P$B3 28.57,20.41 L2.1
N$33
  Top 0.15: EPD_C12.2 13.32,11.88 J1.24
N$38
  Top 0.15: R2_USB.1 21.06,28.62 21.22,28.62 21.48,28.87 J4.B5
OUT+
  Top 0.15: TP_OP.TP 18.68,3.28 18.55,3.4 18.81,3.66 18.81,7.5 19.03,7.71 19.03,10.54 IC2.A3
OUT-
  Top 0.15: IC2.C3 18.67,7.79 18.51,7.62 18.51,3.94 TP_ON.TP
P0.00/XL1
  Top 0.15: U1.P$D2 28.03,17.76 27.96,17.68 27.68,17.68 27.49,17.87 27.49,17.91 25.12,20.27 X2.2 24.07,19.79 C17.2
P0.00/XL2  (via drill 0.15 pad 0.3)
  Top 0.15: U1.P$F2 28.2,17.38 24.96,17.38 X2.1
  Bottom 0.15: C18.2 23.76,17.63 24.42,17.63 X2.1
  other vias: 23,18.39 24.56,17.77
P0.13  (via drill 0.15 pad 0.3)
  Top 0.15: v19.19,7.34 20.12,7.34 22.03,9.25 25.88,9.25 26.18,9.55 26.43,9.55 26.6,9.37 26.6,9.36 26.71,9.25 28.57,11.11 28.87,11.11 29.54,11.78 29.54,12.22 U1.P$AD8 | v13.6,5.56 13.46,5.56 13.43,5.59 13.25,5.59 C30.2 11.14,5.62 R5.1 10.63,5.11 10.63,5.04 10.6,5.01 SW_UP.2
  Bottom 0.15: v19.19,7.34 17.41,5.56 v13.6,5.56
P0.14  (via drill 0.15 pad 0.3)
  Top 0.15: U1.P$AC9 29.65,13.01 29.6,13.05 v29.6,13.03 | v25.29,4.8 24.85,4.8 C31.2 24.59,4.87 24.14,5.32 22.64,5.32 21.6,4.28 SW_ENT.2 21.6,4.95 R8.2
  Bottom 0.15: v29.6,13.03 29.6,11.82 29.78,11.64 29.78,11.33 29.47,11.02 29.47,10.99 29.35,10.87 29.35,8.36 29.09,8.11 29,8.11 25.69,4.8 v25.29,4.8
P1.01  (via drill 0.15 pad 0.3)
  Top 0.15: Q1.1 41.9,11.3 R_PWR_EPD.1 37.51,11.3 35.51,13.3 35.51,13.32 35.29,13.54 35.15,13.54 v35.08,13.61 | U1.P$Y23 v33.88,13.76
  Bottom 0.15: v33.88,13.76 34.04,13.76 34.16,13.88 34.48,13.88 34.75,13.61 v35.08,13.61
P1.02
  Top 0.15: 33.16,5.18 34.58,5.18 35.11,5.71 35.29,5.71 C29.2 35.13,5.94 35.13,9.35 34.38,10.11 34.38,10.54 34.93,11.1 34.93,12.82 34.7,13.06 34.7,13.66 34.48,13.88 34.44,13.88 U1.P$W24 | 33.16,5.18 R7.1 | SW_DN.2 32.6,4.62 33.16,5.18
PMIC_INT  (via drill 0.15 pad 0.3)
  Top 0.15: IC1.A1 26.26,10.77 26.2,10.77 25.94,11.03 25.76,11.03 25.54,11.25 25.54,11.85 26.02,12.34 27.08,12.34 v27.36,12.62 | U1.P$T2 28.32,14.22 v28.33,14.21
  Bottom 0.15: v27.36,12.62 27.45,12.71 27.45,13.41 28.16,14.13 28.26,14.13 v28.33,14.21
PREVGH  (via drill 0.15 pad 0.3)
  Top 0.15: D5.1 4.09,24.75 4.97,24.75 v4.97,24.83 | EPD_C9.2 11.77,13.38 J1.21 9.67,13.38 v9.51,13.54
  Bottom 0.15: v4.97,24.83 8.74,24.83 8.78,24.87 8.9,24.74 8.9,14.14 v9.51,13.54
PREVGL
  Top 0.15: D2.2 5.76,24.87 8.3,24.87 8.76,24.41 8.76,20.68 7.38,19.31 7.38,18.61 8.9,17.09 8.9,13.61 10.14,12.38 J1.23 13.3,12.38 13.35,12.42 13.35,12.92 EPD_C11.2
RESE
  Top 0.15: Q3.2 9.26,29.88 R1_EP_DR.2 9.46,28.86 9.46,28.79 10.43,27.82 10.43,23.98 10.55,23.85 11.32,23.85 11.32,22.69 11.13,22.5 10.8,22.5 J1.3
RESET  (via drill 0.15 pad 0.3)
  Top 0.15: v34.01,22.01 34.01,21.66 34.43,21.25 34.43,20.73 v34.68,20.48 | v31.76,12.1 31.95,11.91 33.29,11.91 v33.87,11.33
  Top 0.3: TP_RESET.TP 31,32.83 35.52,28.3 36.39,28.3 J2.6 v37.16,27.28
  Bottom 0.15: U1.P$AC13 31.18,13.01 31.18,12.9 30.94,12.66 30.94,12.35 31.19,12.1 v31.76,12.1 | v37.16,27.28 36.7,26.82 34.43,24.55 34.43,22.43 v34.01,22.01 | v34.68,20.48 34.68,20.47 34.7,20.45 34.7,14.52 35.51,13.71 35.51,12.96 v33.87,11.33 | v33.87,11.33
  other vias: 31.07,13.01
SCK  (via drill 0.15 pad 0.3)
  Top 0.15: v25.72,18.77 25.45,18.5 23.57,18.5 23.44,18.37 23.44,18.15 23.23,17.95 21.15,17.95 v20.37,17.16 | J1.13 11.01,17.38 v11.33,17.05
  Bottom 0.15: U1.P$A12 30.82,19.2 30.62,19.41 26.43,19.41 25.79,18.77 v25.72,18.77 | v20.37,17.16 20.37,17.27 20.26,17.37 11.71,17.37 11.46,17.13 11.41,17.13 v11.33,17.05
  other vias: 30.82,19.01
SCL  (via drill 0.15 pad 0.3)
  Top 0.15: R17.2 4.79,1.28 TP_SCL.TP | U3.7 30.48,5.33 30.48,5.01 30.32,4.86 27.26,4.86 v25.67,6.45 | v8.76,6.96 8.95,7.16 8.95,7.23 9.09,7.36 9.52,7.36 10.51,6.37 14.16,6.37 IC2.C1 17.66,9.89 16.78,10.77 16.78,15.07 17.43,15.73 17.53,15.73 IC3.12 17.03,15.85 v16.65,16.23 | 26.91,15.89 26.43,16.37 26.43,16.61 25.99,17.05 23.28,17.05 22.68,17.64 22.27,17.64 21.37,16.74 v20.95,16.74 | 26.91,15.89 26.74,15.72 25.65,15.72 25.13,15.2 v25.1,15.2 | 26.91,15.89 26.99,15.81 v26.99,15.79 v27,15.78 | v26.23,10.06 26.74,10.57 IC1.B1 26.74,10.53 v26.31,10.1
  Bottom 0.15: v8.76,6.96 8.76,5.79 6.49,3.53 6.49,3.15 8.2,1.44 TP_SCL.TP | v27,15.78 27.02,15.76 U1.P$M2 | v26.23,10.06 26.23,10 25.67,9.45 v25.67,6.45 | v25.1,15.2 25.1,15.18 24.66,14.73 24.66,11.13 25.51,10.27 26.14,10.27 v26.31,10.1 | v20.95,16.74 20.44,16.23 v16.65,16.23
  other vias: 28.32,15.76 8.2,1.28
SDA  (via drill 0.15 pad 0.3)
  Top 0.15: v24.27,6.07 24.76,5.58 26.11,5.58 27.13,4.56 30.52,4.56 30.98,5.01 30.98,5.33 U3.8 | v21.73,8.36 21.9,8.19 21.98,8.19 22.32,7.85 v25.16,7.85 27.03,7.85 27.63,8.45 v27.72,8.45 | U1.P$L1 27.41,16.01 v26.94,16.48 | IC1.C1 27.14,10.53 27.12,10.51 v27.12,10.49 | v22.62,16.51 22.59,16.48 22.44,16.48 22.17,16.22 22.17,16.04 21.6,15.47 v20.59,15.47
  Top 0.3: TP_SDA.TP v1.41,7.34 6.16,7.34 6.6,7.77 6.77,7.77 R2.1 9.61,10.61 13.03,10.61 13.53,10.11 13.53,8.55 13.79,8.29 14.17,8.29 14.43,8.55 14.43,9.19 v16.02,10.77 | v1.54,3.91 2,3.91 R18.2
  Route2 0.3: v1.41,7.34 1.54,7.21 v1.54,3.91
  Route15 0.15: v21.73,8.36 19.7,10.39 IC2.B2
  Bottom 0.15: IC3.2 18.18,14.83 | 18.18,14.83 18.18,14.1 18.17,14.1 18.17,11.15 | 18.17,11.15 IC2.B2 | v24.27,6.07 24.27,6.96 v25.16,7.85 | v16.02,10.77 17.79,10.77 18.17,11.15 | 18.18,14.83 19.95,14.83 v20.59,15.47 | v27.12,10.49 27.62,9.99 27.62,8.54 v27.72,8.45 | v26.94,16.48 22.65,16.48 v22.62,16.51
  other vias: 18.17,10.39 18.18,15.33
SWDCLK  (via drill 0.15 pad 0.3)
  Top 0.15: J2.4 39,26.96 v39,26.77 38.64,27.13 37.73,27.13 v37.81,27.2 | v42.94,28.68 43.44,29.18 TP_SWDCLK.TP | v38.49,18.26 36.08,15.85 v36.08,15.47 | v34.56,25.37 38.03,21.9 38.19,21.9 38.51,21.57 v38.58,21.57 | v35.45,12.29 35.24,12.5 35.24,12.95 35.13,13.05 v35.13,13.16
  Bottom 0.15: v42.94,28.68 41.39,27.13 39.71,27.13 39.35,26.77 v39,26.77 | v37.81,27.2 37.05,27.96 35.56,27.96 35.26,27.66 34.56,27.66 v34.56,25.37 | v36.08,15.47 36.08,12.93 v35.45,12.29 | U1.P$AA24 34.3,13.49 34.3,13.18 34.9,13.18 34.92,13.16 v35.13,13.16 | v38.58,21.57 38.49,21.49 v38.49,18.26
  other vias: 34.32,13.51
SWDIO  (via drill 0.15 pad 0.3)
  Top 0.15: TP_SWDIO.TP 42.08,26.64 41.59,27.13 40.11,27.13 J2.2 39.57,27.4 v39.57,26.46 | U1.P$AC24 34.56,12.77 v34.56,12.55 | v34.75,10.39 35.02,10.39 35.27,10.64 39,10.64 v39.26,10.9 | v39.45,15.79 39.45,17.95 v39.89,18.39
  Bottom 0.15: v34.56,12.55 33.29,11.28 33.29,11.02 33.92,10.39 v34.75,10.39 | v39.26,10.9 39.26,15.72 39.38,15.85 v39.45,15.79 | v39.89,18.39 39.89,24.59 39.47,25.01 39.47,26.25 39.62,26.4 v39.57,26.46
SWO  (via drill 0.15 pad 0.3)
  Top 0.15: U1.P$AD22 34.43,11.4 34.43,11.13 v34.38,11.08 | v36.97,9.5 37.22,9.24 TP_SWO.TP
  Route15 0.15: v36.97,9.5 35.45,11.02 34.43,11.02 v34.38,11.08
VBAT  (via drill 0.15 pad 0.3)
  Top 0.15: IC1.C2 27.11,11.12 27.11,11.43 26.5,12.04 26.15,12.04 25.91,11.8 v25.91,11.4 | v25.16,11.28 24.9,11.02 24.76,11.02 24.27,10.52 v24.27,9.63 | v25.29,8.86 25.92,8.86 26.24,9.18 26.3,9.24 | v29.41,6.75 29.49,6.83 29.41,6.83 29.24,7 29.24,7.88 29.41,8.04 29.53,8.04 29.6,8.12
  Top 0.3: 30.68,7.5 30.68,7.92 30.88,8.12 32.13,8.12 TP_VBAT.TP | 30.68,7.5 U3.2 | 30.68,7.5 30.18,7.5 U3.3 30.07,7.48 30.07,7.91 29.86,8.12 29.6,8.12 29.38,8.12 29.07,7.81 28.67,7.81 28.07,7.21 v27.57,7.21 | C27.2 29.83,4.06 v29.6,4.29 | 26.24,9.18 26.3,9.18 C37.2 v26.78,8.74
  Bottom 0.15: v25.16,11.28 25.29,11.4 v25.91,11.4 | v24.27,9.63 24.52,9.63 v25.29,8.86 | 26.68,8.1 27.25,8.67 27.06,8.86 26.91,8.86 v26.78,8.74 | 29.22,6.83 29.34,6.83 v29.41,6.75
  Bottom 0.3: v27.57,7.21 26.68,8.1 | v29.6,4.29 29.22,4.67 29.22,6.83
VBUS  (via drill 0.15 pad 0.3)
  Top 0.15: C43.1 40.08,6.39 C42.1 | 30.11,10.01 29.98,10.13 C38.2 29.28,10.2 v28.97,10.52 | v26.17,16.1 v26.17,16.11 25.99,16.29 23.18,16.29 23,16.11 22.59,16.11 v22.55,16.06 | IC1.A2 26.34,11.62 v26.3,11.66 | v27.2,15.02 26.77,14.59 v26.77,14.39 | v26.53,13.25 | v26.53,13.25 26.6,13.31 27.73,13.31 v27.92,13.13 | v26.53,13.25 26.46,13.18 C21.1 25.54,13.18 v25.36,13.01 | v27.83,12.37 27.9,12.45 28.2,12.45 28.26,12.51 U1.P$AD2 28.32,12.05 v28.59,11.79
  Top 0.3: C43.1 37.14,7.69 36.69,7.69 36.4,7.97 v35.57,7.97 | v31.38,8.74 30.11,10.01 | J4.A4_B9 25.52,29.31 25.52,28.02 24.78,27.28 24.78,27.02 24.04,27.76 24.04,28.24 23.87,28.41 23.02,28.41 22.84,28.24 22.84,27.86 v22.57,27.59 D3.5 22.84,27.16 22.84,26.79 23.02,26.61 23.39,26.61 24.27,25.73 v24.27,22.58 | v19.82,19.53 20.59,18.77 v20.59,18.01
  Bottom 0.15: v26.17,16.1 26.61,15.66 26.61,15.63 27.19,15.05 27.19,15.03 v27.2,15.02 | v27.92,13.13 27.83,13.03 v27.83,12.37 | v26.53,13.25 26.53,13.52 26.77,13.75 v26.77,14.39 | v25.36,13.01 25.29,12.93 25.29,12.67 v26.3,11.66 | v28.97,10.52 28.59,10.9 v28.59,11.79
  Bottom 0.3: J4.A9_B4 22.2,28.04 22.24,28.04 22.57,27.71 v22.57,27.59 | v24.27,22.58 21.35,19.66 19.82,19.66 v19.82,19.53 | v20.59,18.01 21.1,17.49 21.26,17.49 21.7,17.05 21.7,16.79 22.43,16.06 v22.55,16.06 | v35.57,7.97 34.82,7.97 34.74,8.05 32.07,8.05 v31.38,8.74
  other vias: 20.83,29.42
VREG  (via drill 0.15 pad 0.3)
  Top 0.15: IC9.A2 IC9.A1 | IC9.A2 IC9.A3 | v7.76,3.53 7.56,3.33 C23.2 5.29,3.33 C24.2 3.95,4.54 3.95,4.8 4.95,5.8 4.95,6.12 5.17,6.34 5.7,6.34 IC9.A2 | C39.1 28.86,8.89 28.86,9.63 v28.94,9.63 | v26.73,11.27 v26.74,11.27 IC1.B2
  Top 0.3: v19.57,5.94 20.46,5.94 TP_VREG.TP 26.68,6.96 27.38,7.66 27.63,7.66 C39.1
  Bottom 0.15: v28.94,9.63 27.93,10.63 27.93,10.85 27.59,11.2 26.81,11.2 26.74,11.27 v26.73,11.27
  Bottom 0.3: v7.76,3.53 13.19,3.53 13.21,3.51 17.14,3.51 v19.57,5.94